# EAGLE board 278nm-LED-board (EAGLE 6.4)
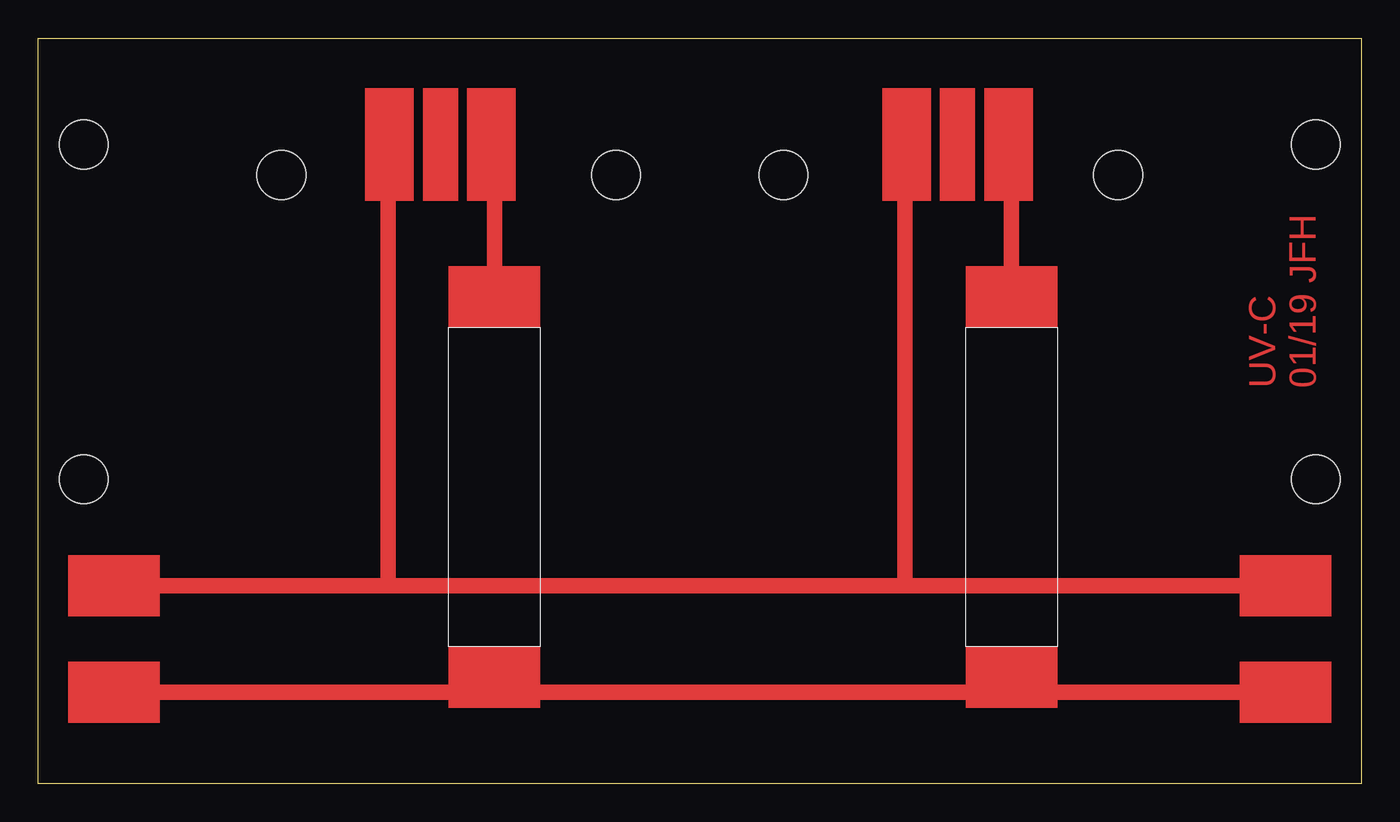
[diagram p0: board, top side]
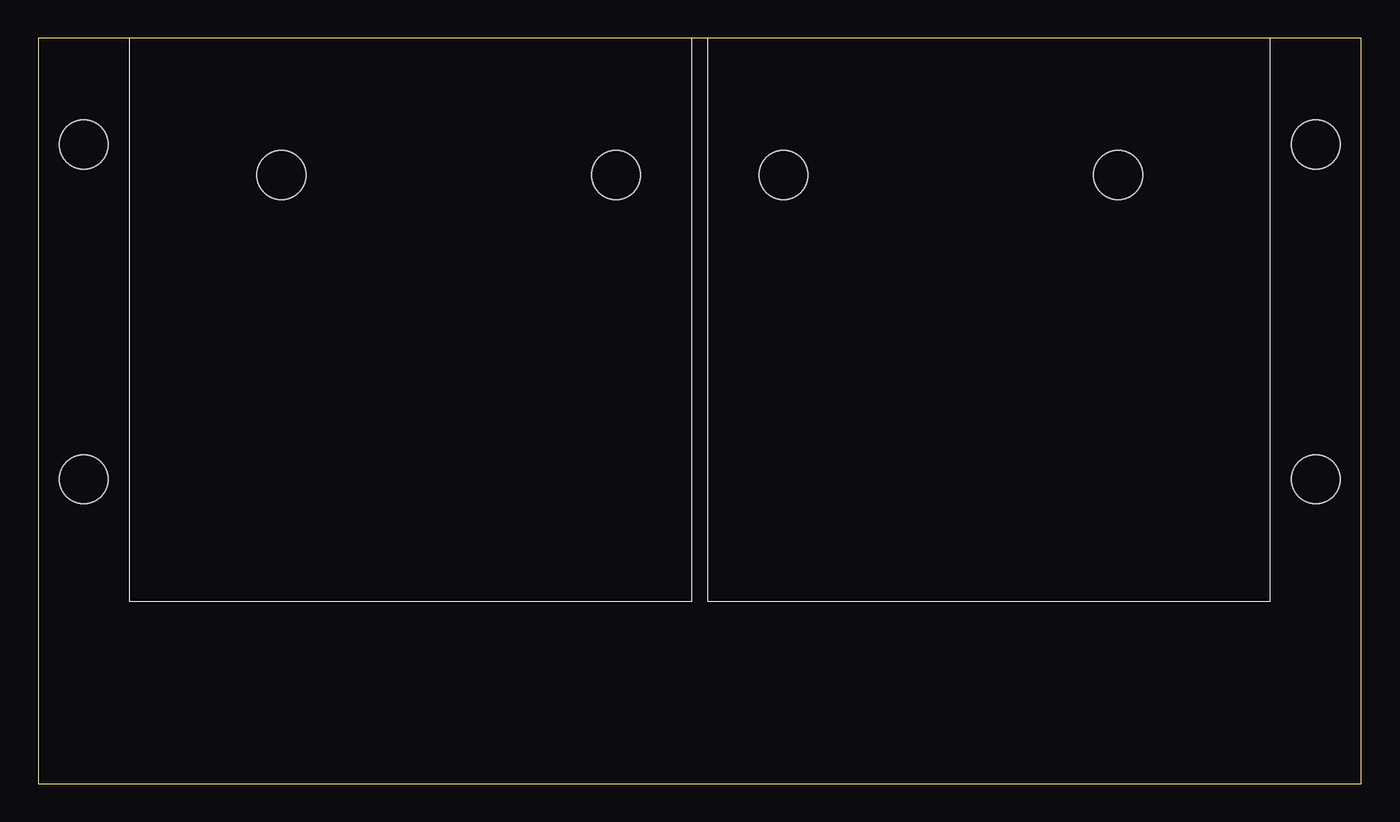
[diagram p1: board, bottom side, seen from below]

Size 87 x 49 mm. Coordinates in mm from the lower left corner, seen from the top.
Outline: 0,0 0,49 87,49 87,0 0,0
Copper layers (1*16): Top 0.035mm / dielectric 1.5mm / Bottom 0.035mm
Design rules "default": minimum track width 10mil, minimum drill 24mil, track to track 8mil, track to pad 8mil, pad to pad 8mil, via to via 8mil, smd to smd 8mil, copper to edge 40mil, drill to drill 8mil, minimum pad ring 10mil, minimum via ring 8mil, stop-mask expansion 4mil, vias tented up to drill 0mil, thermal gap 10mil
Holes 3.2 mm at 38,40 16,40 49,40 71,40 84,42 84,20 3,20 3,42

## Placement (x,y rotation side)
E$1  [FLATLED]  26.5,42 0 top
E$2  [FLATLED]  60.5,42 0 top

## Library data of the parts
E$1 E$2 = led

## Tracks (layer width: path | path; a pad name or v marks a point on that pad's centre or on a via)
S$2
  Top 1.016: 23,41 23,13 | 23,13 5,13 | 82,13 57,13 | 57,13 23,13 | 57,42 57,13
S$3
  Top 1.016: 30,41 30,32
S$4
  Top 1.016: 5,6 61,6 64,6 83,6
S$5
  Top 1.016: 64,42 64,31
S$6  (via drill 0.6)
  other vias: 3,42
S$7  (via drill 0.6)
  other vias: 3,20
S$8  (via drill 0.6)
  other vias: 84,20
S$9  (via drill 0.6)
  other vias: 84,42
S$10  (via drill 0.6)
  other vias: 16,40
S$11  (via drill 0.6)
  other vias: 38,40
S$12  (via drill 0.6)
  other vias: 49,40
S$13  (via drill 0.6)
  other vias: 71,40
(copper drawn outside any net)
  shapes: Top area x8

## Text on the board
Top: UV-C / 01/19 JFH